# EAGLE board TTGO_shield_revE (EAGLE 9.0.1)
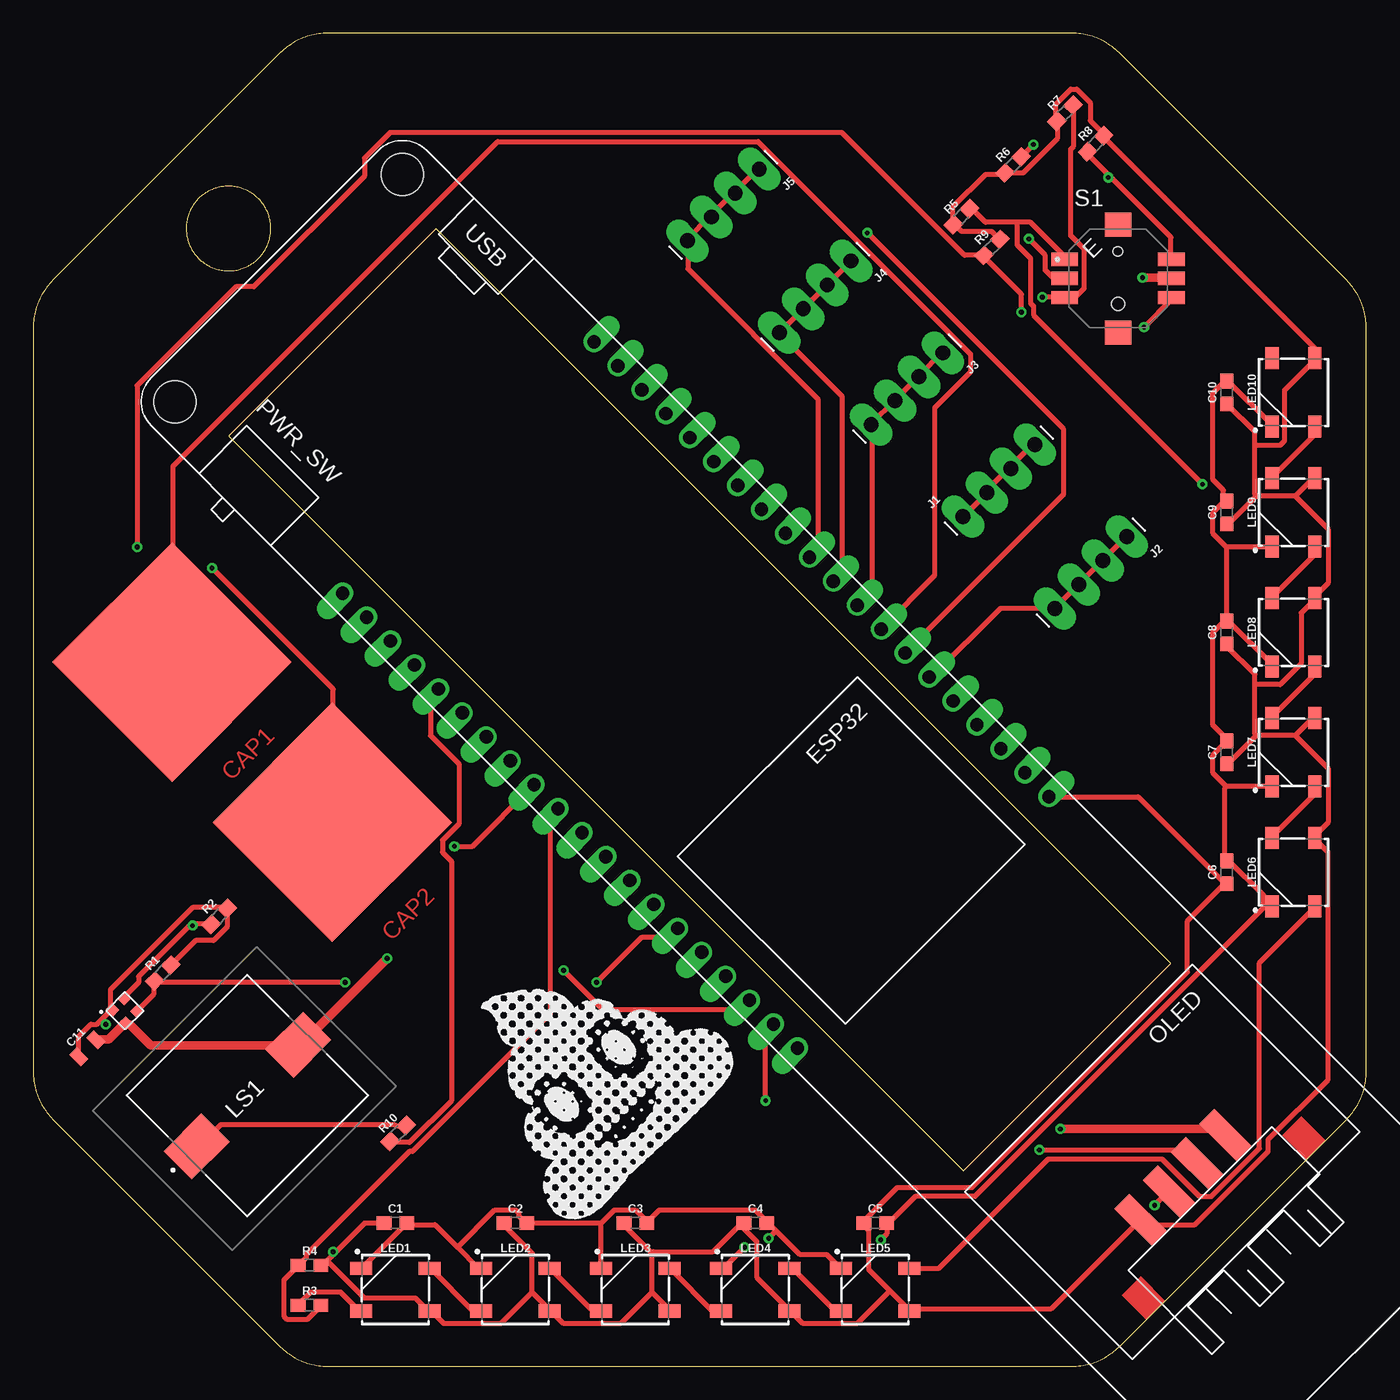
[diagram p0: board, top side]
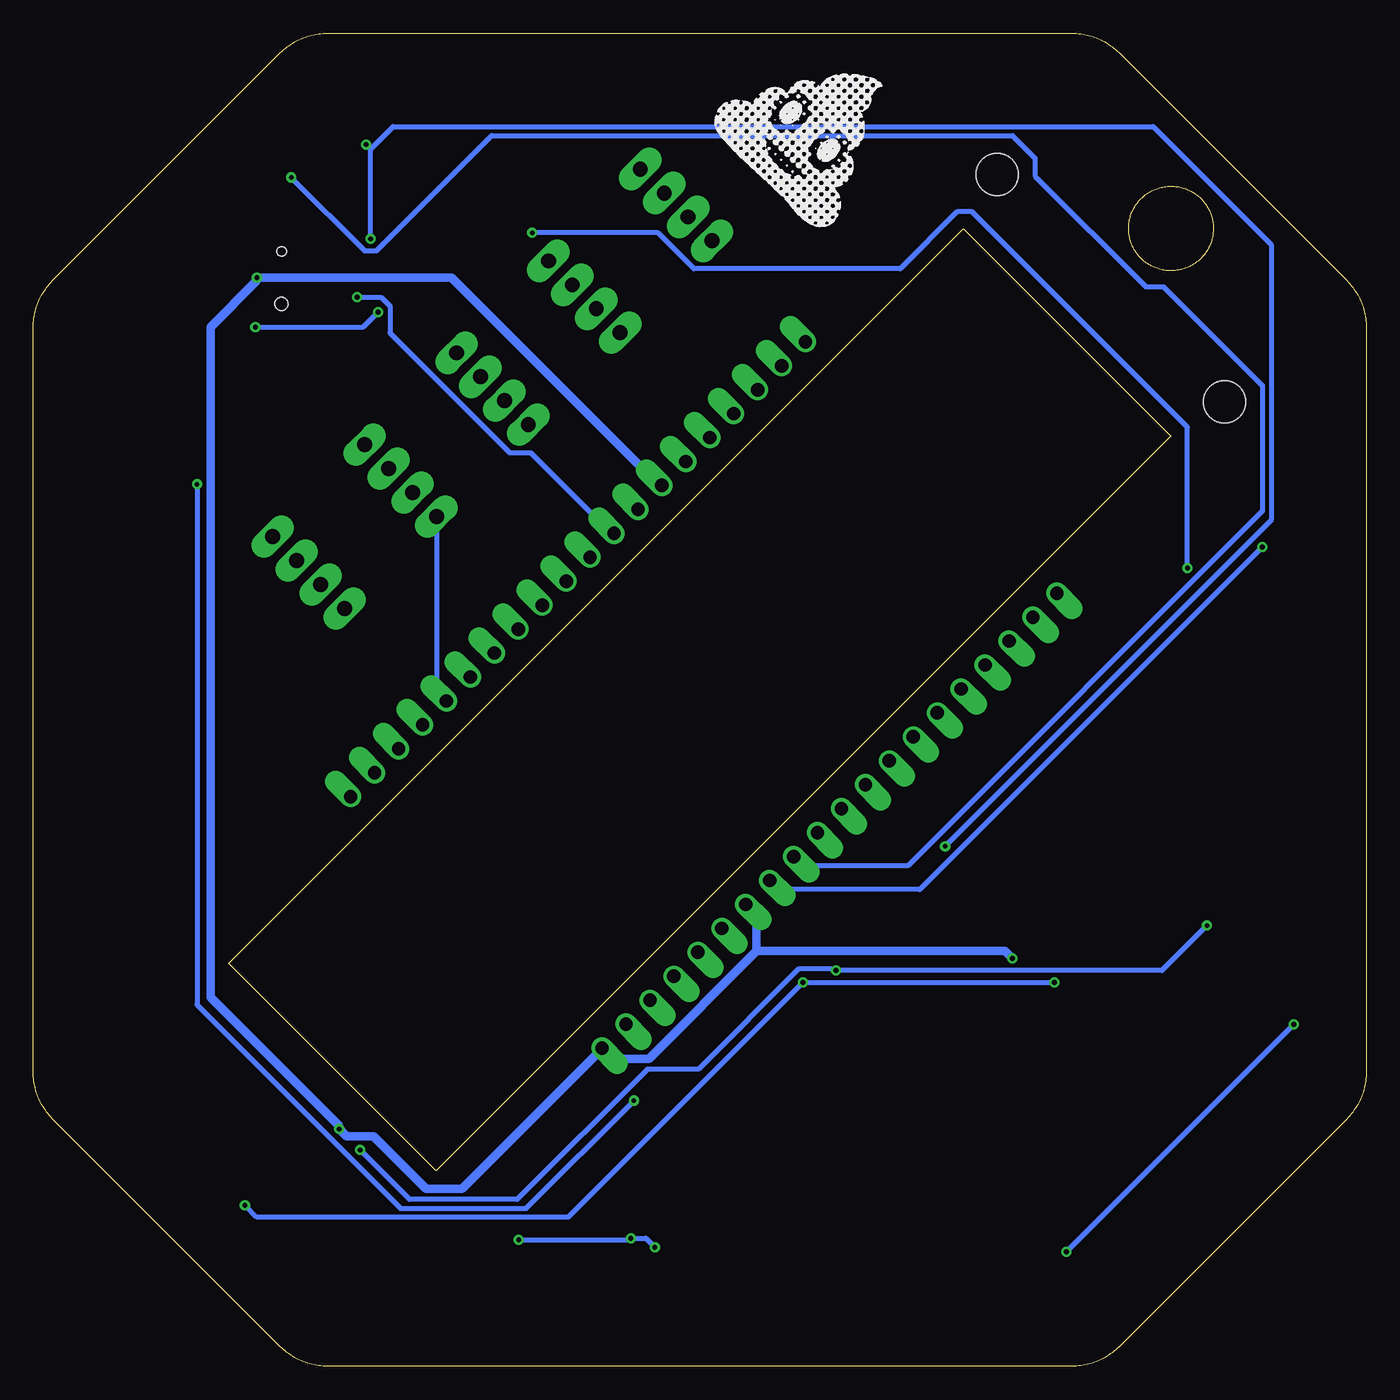
[diagram p1: board, bottom side, seen from below]

Size 100 x 100 mm. Coordinates in mm from the lower left corner, seen from the top.
Outline: 1.46,81.46 1.35,81.34 1.23,81.22 1.12,81.08 1.02,80.95 0.91,80.81 0.82,80.67 0.73,80.53 0.64,80.38 0.56,80.23 0.48,80.08 0.41,79.92 0.35,79.76 0.29,79.6 0.23,79.44 0.19,79.28 0.14,79.11 0.1,78.95 0.07,78.78 0.05,78.61 0.03,78.44 0.01,78.27 0,78.1 0,77.93 0,22.07 0,21.9 0.01,21.73 0.03,21.56 0.05,21.39 0.07,21.22 0.1,21.05 0.14,20.89 0.19,20.72 0.23,20.56 0.29,20.4 0.35,20.24 0.41,20.08 0.48,19.92 0.56,19.77 0.64,19.62 0.73,19.47 0.82,19.33 0.91,19.19 1.02,19.05 1.12,18.92 1.23,18.79 1.35,18.66 1.46,18.54 18.54,1.46 18.66,1.35 18.78,1.23 18.92,1.12 19.05,1.02 19.19,0.92 19.33,0.82 19.47,0.73 19.62,0.64 19.77,0.56 19.92,0.48 20.08,0.41 20.24,0.35 20.4,0.29 20.56,0.23 20.72,0.19 20.89,0.14 21.05,0.1 21.22,0.07 21.39,0.05 21.56,0.03 21.73,0.01 21.9,0 22.07,0 77.93,0 78.1,0 78.27,0.01 78.44,0.03 78.61,0.05 78.78,0.07 78.95,0.1 79.11,0.14 79.28,0.19 79.44,0.23 79.6,0.29 79.76,0.35 79.92,0.41 80.08,0.48 80.23,0.56 80.38,0.64 80.53,0.73 80.67,0.82 80.81,0.92 80.95,1.02 81.08,1.12 81.21,1.23 81.34,1.35 81.46,1.46 98.54,18.54 98.65,18.66 98.77,18.79 98.88,18.92 98.98,19.05 99.08,19.19 99.18,19.33 99.27,19.47 99.36,19.62 99.44,19.77 99.52,19.92 99.59,20.08 99.65,20.24 99.71,20.4 99.77,20.56 99.81,20.72 99.86,20.89 99.9,21.05 99.93,21.22 99.95,21.39 99.97,21.56 99.99,21.73 100,21.9 100,22.07 100,77.93 100,78.1 99.99,78.27 99.97,78.44 99.95,78.61 99.93,78.78 99.9,78.95 99.86,79.11 99.81,79.28 99.77,79.44 99.71,79.6 99.65,79.76 99.59,79.92 99.52,80.08 99.44,80.23 99.36,80.38 99.27,80.53 99.18,80.67 99.08,80.81 98.98,80.95 98.88,81.08 98.77,81.22 98.65,81.34 98.54,81.46 81.46,98.54 81.34,98.65 81.21,98.77 81.08,98.88 80.95,98.98 80.81,99.09 80.67,99.18 80.53,99.27 80.38,99.36 80.23,99.44 80.08,99.52 79.92,99.59 79.76,99.65 79.6,99.71 79.44,99.77 79.28,99.81 79.11,99.86 78.95,99.9 78.78,99.93 78.61,99.95 78.44,99.97 78.27,99.99 78.1,100 77.93,100 22.07,100 21.9,100 21.73,99.99 21.56,99.97 21.39,99.95 21.22,99.93 21.05,99.9 20.89,99.86 20.72,99.81 20.56,99.77 20.4,99.71 20.24,99.65 20.08,99.59 19.92,99.52 19.77,99.44 19.62,99.36 19.47,99.27 19.33,99.18 19.19,99.09 19.05,98.98 18.92,98.88 18.78,98.77 18.66,98.65 18.54,98.54 1.46,81.46
Outline: 16.89,87.6 16.81,87.68 16.73,87.75 16.64,87.82 16.56,87.89 16.47,87.95 16.38,88.02 16.28,88.07 16.19,88.13 16.09,88.18 15.99,88.23 15.89,88.28 15.79,88.32 15.69,88.35 15.58,88.39 15.48,88.42 15.37,88.45 15.26,88.47 15.15,88.49 15.04,88.51 14.93,88.52 14.82,88.53 14.71,88.53 14.6,88.53 14.49,88.53 14.38,88.52 14.27,88.51 14.16,88.49 14.06,88.48 13.95,88.45 13.84,88.43 13.73,88.4 13.63,88.36 13.53,88.33 13.42,88.29 13.32,88.24 13.22,88.19 13.13,88.14 13.03,88.09 12.94,88.03 12.84,87.97 12.75,87.91 12.67,87.84 12.58,87.77 12.5,87.7 12.42,87.62 12.34,87.54 12.27,87.46 12.2,87.38 12.13,87.29 12.06,87.2 12,87.11 11.94,87.02 11.88,86.92 11.83,86.83 11.78,86.73 11.74,86.63 11.69,86.53 11.65,86.42 11.62,86.32 11.59,86.21 11.56,86.11 11.54,86 11.51,85.89 11.5,85.78 11.49,85.67 11.48,85.56 11.47,85.45 11.47,85.34 11.47,85.23 11.48,85.12 11.49,85.01 11.5,84.9 11.52,84.79 11.54,84.69 11.57,84.58 11.59,84.47 11.63,84.37 11.66,84.26 11.7,84.16 11.75,84.06 11.79,83.96 11.84,83.86 11.9,83.76 11.95,83.67 12.01,83.58 12.08,83.49 12.14,83.4 12.21,83.31 12.29,83.23 12.36,83.15 12.44,83.07 12.52,83 12.6,82.92 12.69,82.85 12.78,82.79 12.87,82.73 12.96,82.67 13.05,82.61 13.15,82.55 13.25,82.5 13.35,82.46 13.45,82.41 13.55,82.37 13.66,82.34 13.76,82.31 13.87,82.28 13.97,82.25 14.08,82.23 14.19,82.21 14.3,82.2 14.41,82.19 14.52,82.18 14.63,82.18 14.74,82.18 14.85,82.19 14.96,82.2 15.07,82.21 15.18,82.23 15.29,82.25 15.4,82.27 15.5,82.3 15.61,82.33 15.71,82.37 15.81,82.4 15.92,82.45 16.02,82.49 16.12,82.54 16.21,82.59 16.31,82.65 16.4,82.71 16.49,82.77 16.58,82.84 16.67,82.91 16.75,82.98 16.83,83.05 16.91,83.13 16.98,83.21 17.06,83.29 17.13,83.38 17.2,83.46 17.26,83.55 17.32,83.65 17.38,83.74 17.43,83.84 17.48,83.93 17.53,84.03 17.58,84.13 17.62,84.24 17.65,84.34 17.69,84.45 17.72,84.55 17.74,84.66 17.76,84.77 17.78,84.88 17.8,84.98 17.81,85.09 17.82,85.2 17.82,85.31 17.82,85.42 17.81,85.53 17.81,85.64 17.79,85.75 17.78,85.86 17.76,85.97 17.74,86.08 17.71,86.19 17.68,86.29 17.64,86.4 17.61,86.5 17.56,86.6 17.52,86.7 17.47,86.8 17.42,86.9 17.36,86.99 17.31,87.09 17.24,87.18 17.18,87.27 17.11,87.36 17.04,87.44 16.97,87.52 16.89,87.6
Outline: 30.2,85.36 14.64,69.8 69.8,14.64 85.36,30.2 30.2,85.36
Copper layers (1*16): Top 0.035mm / dielectric 1.5mm / Bottom 0.035mm
Design rules "default *": minimum track width 6mil, minimum drill 0.35mm, track to track 6mil, track to pad 6mil, pad to pad 6mil, via to via 6mil, smd to smd 6mil, copper to edge 40mil, drill to drill 6mil, minimum pad ring 12mil, minimum via ring 8mil, stop-mask expansion 4mil, vias tented up to drill 0mil, thermal gap 10mil
Net classes: 0 default: width 0.381 mm, clearance 0.254 mm; 1 ground: width 0.635 mm, clearance 0.254 mm

## Footprints (pad centres in the part's own frame; a part is rotated, then mirrored left to right if it is on the bottom)
0603 = smd 1.1 x 1: 1 -0.85,0; 2 0.85,0
0805 = smd 0.8 x 1.2: 1 -0.9,0; 2 0.9,0
CAPSENSE_BUTTON = smd 12.7 x 12.7: 1 0,0
10120045-400LF = smd 1.6 x 4: A 0.8,2; B 3.8,2; C 6.8,2; D 9.8,2
1X04_LONGPADS = drill 1.118 pad 1.88 long: 1 0,0; 2 2.54,0; 3 5.08,0; 4 7.62,0
WS2812B = smd 1.651 x 1: 1 2.577,-1.6; 2 2.577,1.6; 3 -2.577,1.6; 4 -2.577,-1.6
CT1205HSMTTR = smd 4 x 3: 1 -5.4,0; 2 5.4,0
CHIPLED-4 = smd 0.7 x 0.75: 1 -0.6,0.7; 2 -0.6,-0.7; 3 0.6,-0.7; 4 0.6,0.7
TTGO-ESP32-OLED-18650 = drill 1 offset: 0 26.67,16.51; 2 26.67,13.97; 3.3V 0,49.53; 4 26.67,19.05; 5 26.67,26.67; 5V 0,3.81; 12 0,19.05; 13 0,13.97; 14 0,21.59; 15 26.67,11.43; 16 26.67,21.59; 17 26.67,24.13; 18 26.67,29.21; 19 26.67,31.75; 21 26.67,36.83; 22 26.67,44.45; 23 26.67,46.99; 25 0,29.21; 26 0,26.67; 27 0,24.13; 32 0,34.29; 33 0,31.75; 34 0,39.37; 35 0,36.83; CLK 26.67,3.81; CMD 0,6.35; EN 0,46.99; GND 0,16.51; GND_2 26.67,34.29; GND_3 26.67,49.53; NC 0,1.27; NC_2 26.67,1.27; RX 26.67,39.37; SD0 26.67,6.35; SD1 26.67,8.89; SD2 0,11.43; SD3 0,8.89; SVN 0,41.91; SVP 0,44.45; TX 26.67,41.91 | hole 3.175: 1.27,-17.78; 25.4,-17.78
JS1400BFQ = smd 2 x 1: 1 -4,1.43; 2 -4,0; 3 -4,-1.43; 4 4,1.43; 5 4,0; 6 4,-1.43 | smd 2 x 1.8: P$1 0,4.05; P$2 0,-4.05 | hole 0.991: 0,-1.905 | hole 0.711: 0,2.032

## Placement (x,y rotation side)
C1  0.1uF  [0603]  27.17,10.75 0 top
C2  0.1uF  [0603]  36.17,10.75 0 top
C3  0.1uF  [0603]  45.17,10.75 0 top
C4  0.1uF  [0603]  54.17,10.75 0 top
C5  0.1uF  [0603]  63.17,10.75 0 top
C6  0.1uF  [0603]  89.54,37.06 90 top
C7  0.1uF  [0603]  89.54,46.06 90 top
C8  0.1uF  [0603]  89.54,55.06 90 top
C9  0.1uF  [0603]  89.54,64.06 90 top
C10  0.1uF  [0603]  89.54,73.06 90 top
C11  1.0uF  [0805]  4.04,23.84 45 top
CAP1  CAPSENSE_BUTTON  [CAPSENSE_BUTTON]  10.4,52.83 45 top
CAP2  CAPSENSE_BUTTON  [CAPSENSE_BUTTON]  22.42,40.81 45 top
HEMA1  10120045-400LF  [10120045-400LF]  83.94,8.99 45 top
J1  [1X04_LONGPADS]  69.76,63.75 45 top
J2  [1X04_LONGPADS]  82.04,62.24 225 top
J3  [1X04_LONGPADS]  68.25,76.03 225 top
J4  [1X04_LONGPADS]  61.36,82.92 225 top
J5  [1X04_LONGPADS]  54.46,89.82 225 top
LED1  WS2812B  [WS2812B]  27.17,5.75 0 top
LED2  WS2812B  [WS2812B]  36.17,5.75 0 top
LED3  WS2812B  [WS2812B]  45.17,5.75 0 top
LED4  WS2812B  [WS2812B]  54.17,5.75 0 top
LED5  WS2812B  [WS2812B]  63.17,5.75 0 top
LED6  WS2812B  [WS2812B]  94.54,37.06 90 top
LED7  WS2812B  [WS2812B]  94.54,46.06 90 top
LED8  WS2812B  [WS2812B]  94.54,55.06 90 top
LED9  WS2812B  [WS2812B]  94.54,64.06 90 top
LED10  WS2812B  [WS2812B]  94.54,73.06 90 top
LS1  CT-1205H-SMT-TR  [CT1205HSMTTR]  16.06,20.3 45 top
LTSNS1  LTR-329ALS-01  [CHIPLED-4]  6.87,26.67 45 top
MAIN  TTGO-ESP32-OLED-18650  [TTGO-ESP32-OLED-18650]  41.16,77.75 225 top
R1  4.7k  [0603]  9.69,29.49 45 top
R2  4.7k  [0603]  13.94,33.74 45 top
R3  470  [0603]  20.72,4.57 0 top
R4  10k  [0603]  20.72,7.57 0 top
R5  10k  [0603]  69.62,86.24 45 top
R6  10k  [0603]  73.51,90.13 45 top
R7  10k  [0603]  77.4,94.02 45 top
R8  10k  [0603]  79.7,91.72 45 top
R9  10k  [0603]  71.92,83.94 45 top
R10  220  [0603]  27.37,17.47 45 top
S1  JS1400BFQ  [JS1400BFQ]  81.38,81.6 0 top

## Library data of the parts
C1-C10 = SparkFun-Capacitors; PROD_ID: CAP-08604
C11 = SparkFun-Capacitors; PROD_ID: CAP-08064
CAP1 CAP2 HEMA1 MAIN S1 = BadgeParts
J1-J5 = SparkFun-Connectors; PROD_ID: CONN-09696
LED1-LED10 = SparkFun-LED; PROD_ID: DIO-12503
LS1 = BadgeParts; ARROW_PART_NUMBER: CT-1205H-SMT-TR; ARROW_PRICE/STOCK: https://www.arrow.com/en/products/ct-1205h-smt-tr/cui-inc; DESCRIPTION: Speakers & Transducers Buzzers; HEIGHT: 10mm; MANUFACTURER_NAME: CUI; MANUFACTURER_PART_NUMBER: CT-1205H-SMT-TR
LTSNS1 = NickParts
R1 R2 = SparkFun-Resistors; PROD_ID: RES-07857
R3 R10 = SparkFun-Resistors; PROD_ID: RES-07869
R4-R9 = SparkFun-Resistors; PROD_ID: RES-00824

## Nets
5V: MAIN.5V
15: MAIN.15 R10.1
25: J3.1 J3.2 J3.3 J3.4 MAIN.25
26: J4.1 J4.2 J4.3 J4.4 MAIN.26
27: J5.1 J5.2 J5.3 J5.4 MAIN.27
32: CAP2.1 MAIN.32
33: CAP1.1 MAIN.33
34: J1.1 J1.2 J1.3 J1.4 MAIN.34
35: J2.1 J2.2 J2.3 J2.4 MAIN.35
GND [ground]: C11.2 HEMA1.D LS1.2 LTSNS1.2 MAIN.GND MAIN.GND_2 MAIN.GND_3 S1.5
GND1: C1.2 C2.2 C3.2 C4.2 C5.2 C6.2 C7.2 C8.2 C9.2 C10.2 LED1.3 LED2.3 LED3.3 LED4.3 LED5.3 LED6.3 LED7.3 LED8.3 LED9.3 LED10.3
J-DOWN: MAIN.18 R8.1 S1.4
J-LEFT: MAIN.19 R9.1 S1.6
J-PRESS: MAIN.16 R6.2 S1.2
J-RIGHT: MAIN.23 R5.2 S1.1
J-UP: MAIN.14 R7.2 S1.3
N$1: LED5.2 LED6.4
N$2: LED6.2 LED7.4
N$3: LED7.2 LED8.4
N$4: LED8.2 LED9.4
N$5: LED4.2 LED5.4
N$6: LED9.2 LED10.4
N$7: LS1.1 R10.2
N$9: LED1.2 LED2.4
N$10: LED2.2 LED3.4
N$11: LED3.2 LED4.4
N$12: LED1.4 R3.1
RGBLEDS: MAIN.17 R3.2 R4.1
SCL: HEMA1.C LTSNS1.4 MAIN.22 R2.1
SDA: HEMA1.B LTSNS1.3 MAIN.21 R1.1
VDD: C1.1 C2.1 C3.1 C4.1 C5.1 C6.1 C7.1 C8.1 C9.1 C10.1 C11.1 HEMA1.A LED1.1 LED2.1 LED3.1 LED4.1 LED5.1 LED6.1 LED7.1 LED8.1 LED9.1 LED10.1 LTSNS1.1 MAIN.3.3V R1.2 R2.2 R4.2 R5.1 R6.1 R7.1 R8.2 R9.2

## Tracks (layer width: path | path; a pad name or v marks a point on that pad's centre or on a via)
15
  Top 0.381: R10.1 26.88,16.78 28.22,16.78 31.37,19.93 31.37,37.89 30.69,38.56 30.69,39.46 31.93,40.69 31.93,45.18 29.79,47.31 29.79,50.01 30.47,50.68 MAIN.15
25
  Top 0.381: J3.1 68.18,76.05 66.5,74.37 J3.2 66.39,74.26 64.71,72.57 J3.3 64.59,72.46 62.91,70.78 J3.4 62.91,70.55 62.91,58.2 61.9,57.19 MAIN.25
26
  Top 0.381: J4.1 61.34,82.9 59.65,81.22 J4.2 59.54,81.1 57.86,79.42 J4.3 57.63,79.19 56.06,77.62 J4.4 55.95,77.51 60.66,72.8 60.66,59.55 60.1,58.99 MAIN.26
27
  Top 0.381: J5.1 54.38,89.86 52.69,88.18 J5.2 52.58,88.06 50.9,86.38 J5.3 50.79,86.27 49.1,84.58 J5.4 49.1,84.36 49.1,82.34 58.87,72.57 58.87,61.35 58.31,60.79 MAIN.27
32  (via drill 0.35)
  Top 0.381: v62.57,85.03 77.28,70.33 77.28,65.39 65.49,53.6 MAIN.32 | v13.41,59.89 22.5,50.79 22.5,40.92 CAP2.1
  Bottom 0.381: v62.57,85.03 53.14,85.03 50.45,82.34 34.96,82.34 30.69,86.6 29.57,86.6 13.41,70.44 v13.41,59.89
33
  Top 0.381: MAIN.33 63.69,55.4 67.62,59.33 67.62,71.9 70.32,74.59 70.32,75.94 54.38,91.88 34.85,91.88 10.49,67.52 10.49,52.93 CAP1.1
34
  Top 0.381: J1.4 75.03,69.2 73.35,67.52 J1.3 73.24,67.41 71.55,65.72 J1.2 71.44,65.39 69.87,63.82 J1.1
  Bottom 0.381: J1.1 69.76,50.68 69.08,50.01 MAIN.34
35
  Top 0.381: J2.1 81.99,62.24 80.31,60.56 J2.2 80.2,60.45 78.51,58.76 J2.3 78.29,58.54 76.72,56.97 J2.4 76.6,56.86 72.56,56.86 67.4,51.69 MAIN.35
GND  (via drill 0.35)
  Top 0.635: v83.23,81.66 85.25,81.66 S1.5 | C11.2 4.76,24.53 5.66,24.53 6.89,25.76 LTSNS1.2 7.23,25.65 8.8,24.08 19.8,24.08 LS1.2 20.14,24.19 v26.54,30.59 | v77.05,17.79 88.95,17.79 89.4,17.34 HEMA1.D
  Bottom 0.635: MAIN.GND 53.03,66.06 68.63,81.66 v83.23,81.66 83.23,81.44 86.71,77.96 86.71,27.67 77.05,18.02 v77.05,17.79 76.49,17.23 74.47,17.23 70.54,13.3 67.85,13.3 57.52,23.63 MAIN.GND_3 57.3,23.85 56.51,23.07 53.82,23.07 45.73,31.15 | 45.73,31.15 45.73,33.62 46.63,34.52 MAIN.GND_2 | v26.54,30.59 27.1,31.15 45.73,31.15
GND1  (via drill 0.35)
  Top 0.381: 55.72,10.16 57.52,8.36 59.54,8.36 60.55,7.35 LED5.3 | 55.72,10.16 55.16,10.72 C4.2 55.05,10.83 54.15,11.73 46.97,11.73 46.18,10.94 C3.2 46.07,10.83 45.17,11.73 43.6,11.73 42.59,10.72 | v53.37,8.92 51.8,7.35 LED4.3 | 55.72,10.16 v55.16,9.6 | 42.59,10.72 LED3.3 | 42.59,10.72 37.2,10.72 C2.2 36.87,10.83 36.42,11.28 36.42,11.51 36.19,11.73 34.62,11.73 31.81,8.92 | LED1.3 24.63,7.35 28,10.72 C1.2 28.11,10.61 30.13,10.61 31.81,8.92 | 31.81,8.92 33.39,7.35 LED2.3 | LED10.3 92.99,70.55 89.63,73.92 C10.2 89.4,73.92 88.5,73.02 88.5,66.51 89.29,65.72 89.29,65.05 C9.2 89.4,64.94 88.5,64.04 88.5,62.47 89.51,61.46 | C8.2 89.63,55.96 92.99,52.59 LED8.3 | 89.51,61.46 92.88,61.46 LED9.3 | 89.51,61.46 89.51,56.07 C8.2 | 89.51,43.5 88.5,44.51 88.5,45.86 89.51,46.87 C7.2 89.51,47.09 88.5,48.1 88.5,55.06 89.4,55.96 C8.2 | 89.51,43.5 92.88,43.5 LED7.3 | 92.43,34.52 70.65,12.74 66.16,12.74 64.14,10.72 C5.2 64.03,10.61 64.03,9.93 v63.58,9.49 | 92.43,34.52 92.88,34.52 LED6.3 | 92.43,34.52 92.32,34.63 92.32,35.3 89.63,38 C6.2 89.4,38 89.4,43.39 89.51,43.5
  Bottom 0.381: v53.37,8.92 54.04,9.6 v55.16,9.6 55.28,9.49 v63.58,9.49
J-DOWN  (via drill 0.35)
  Top 0.381: 80.76,89.3 85.36,84.7 85.36,83.12 S1.4 | 80.76,89.3 79.07,90.98 R8.1 | v80.64,89.19 80.76,89.3
  Bottom 0.381: v80.64,89.19 75.14,83.68 74.25,83.68 65.6,92.33 26.54,92.33 24.86,90.64 24.86,89.3 16.55,80.99 15.2,80.99 7.79,73.58 7.79,64.15 34.4,37.55 42.25,37.55 42.93,38.22 MAIN.18
J-LEFT  (via drill 0.35)
  Top 0.381: v74.13,79.08 74.13,80.43 71.33,83.24 R9.1 71.22,83.35 69.87,83.35 60.66,92.55 26.76,92.55 24.86,90.64 24.86,89.3 16.55,80.99 15.2,80.99 7.79,73.58 v7.79,61.46 | v83.34,77.96 85.36,79.98 S1.6
  Bottom 0.381: v74.13,79.08 75.26,77.96 v83.34,77.96 | v7.79,61.46 33.5,35.75 44.05,35.75 44.72,36.43 MAIN.19
J-PRESS  (via drill 0.35)
  Top 0.381: v75.03,91.65 74.13,90.76 R6.2 | v74.7,84.58 75.93,83.35 75.93,82.23 76.6,81.55 77.28,81.55 S1.2 | v31.59,39.01 32.94,39.01 37.54,43.61 MAIN.16
  Bottom 0.381: 74.7,91.32 v75.03,91.65 | v74.7,84.58 74.7,91.32 | v31.59,39.01 7.12,63.48 7.12,84.13 15.99,93 73.01,93 74.7,91.32
J-RIGHT  (via drill 0.35)
  Top 0.381: 73.8,85.82 74.81,85.82 77.39,83.24 S1.1 | 73.8,85.82 71.44,85.82 70.43,86.83 R5.2 | v54.94,19.93 54.94,24.86 55.61,25.54 MAIN.23 | v87.72,66.17 75.03,78.86 75.03,79.53 74.81,79.76 74.81,83.12 73.8,84.13 73.8,85.82
  Bottom 0.381: v54.94,19.93 63.02,11.84 72.45,11.84 87.72,27.11 v87.72,66.17
J-UP  (via drill 0.35)
  Top 0.381: R7.2 78.06,94.46 78.06,91.54 77.84,91.32 77.84,84.81 78.85,83.8 78.85,80.88 78.18,80.21 77.5,80.21 S1.3 77.28,80.21 v75.71,80.21
  Bottom 0.381: v75.71,80.21 73.91,80.21 73.24,79.53 73.24,77.51 64.26,68.53 62.68,68.53 56.62,62.47 MAIN.14
N$1
  Top 0.381: LED6.4 96.14,34.41 91.98,30.25 91.98,16.33 88.39,12.74 87.49,12.74 84.69,15.55 76.15,15.55 67.96,7.35 65.94,7.35 LED5.2
N$2
  Top 0.381: LED6.2 92.99,39.79 96.14,42.94 96.14,43.39 LED7.4
N$3
  Top 0.381: LED7.2 92.99,48.77 96.14,51.92 96.14,52.37 LED8.4
N$4
  Top 0.381: LED8.2 92.99,57.75 96.14,60.9 96.14,61.35 LED9.4
N$5
  Top 0.381: LED4.2 56.96,7.35 60.21,4.1 60.44,4.1 LED5.4
N$6
  Top 0.381: LED9.2 92.99,66.73 96.14,69.88 96.14,70.33 LED10.4
N$7
  Top 0.381: R10.2 27.89,18.02 27.21,18.02 27.1,18.13 14.08,18.13 12.4,16.45 LS1.1
N$9
  Top 0.381: LED1.2 29.79,7.35 33.05,4.1 33.5,4.1 LED2.4
N$10
  Top 0.381: LED2.2 38.77,7.35 42.03,4.1 42.48,4.1 LED3.4
N$11
  Top 0.381: LED3.2 47.87,7.24 51.01,4.1 51.46,4.1 LED4.4
N$12
  Top 0.381: R3.1 19.92,4.66 20.81,5.56 23.06,5.56 24.52,4.1 LED1.4
RGBLEDS
  Top 0.381: R3.2 21.49,4.43 20.59,3.54 19.02,3.54 18.79,3.76 18.79,6.45 19.8,7.47 R4.1 20.03,7.69 20.48,8.14 20.48,8.36 28.22,16.11 28.45,16.11 38.77,26.44 38.77,41.03 39.45,41.7 MAIN.17
SCL  (via drill 0.35)
  Top 0.381: 11.83,33.17 7.9,29.24 7.9,28.79 6.78,27.67 LTSNS1.4 | 11.83,33.17 13.18,33.17 R2.1 | v39.78,29.69 42.7,26.77 53.03,26.77 53.7,27.45 MAIN.22 | v11.95,33.06 11.83,33.17 | v75.48,16.22 86.26,16.22 87.27,15.21 HEMA1.C
  Bottom 0.381: v11.95,33.06 15.31,29.69 v39.78,29.69 39.9,29.8 42.59,29.8 50.11,22.28 53.93,22.28 63.69,12.52 71.78,12.52 v75.48,16.22
SDA  (via drill 0.35)
  Top 0.381: LTSNS1.3 7.79,26.66 9.03,27.9 9.03,28.79 R1.1 9.25,28.79 v23.4,28.79 | v42.25,28.79 45.62,32.16 47.64,32.16 48.32,32.83 MAIN.21 | v84.12,12.07 85.14,13.08 HEMA1.B
  Bottom 0.381: v23.4,28.79 v42.25,28.79 59.88,11.17 83.23,11.17 v84.12,12.07
VDD  (via drill 0.35)
  Top 0.381: 91.76,47.31 89.63,45.18 C7.1 | 94.68,47.31 91.76,47.31 | 94.68,47.31 96.02,48.66 LED7.1 | 91.65,51.13 91.65,47.43 91.76,47.31 | 91.65,51.13 91.65,51.92 89.51,54.05 C8.1 | 94.68,47.31 97.15,44.85 97.15,40.8 96.14,39.79 LED6.1 96.14,39.57 97.15,38.56 97.15,21.5 92.66,17.01 92.66,16.11 87.16,10.61 83.56,10.61 83.23,10.94 HEMA1.A 83,10.94 76.38,4.32 65.83,4.32 LED5.1 65.72,4.21 64.26,5.67 | R9.2 72.45,84.58 71.89,85.14 69.64,85.14 69.2,85.59 R5.1 68.97,85.82 68.97,86.94 71.44,89.41 72.79,89.41 R6.1 73.12,89.52 74.25,89.52 76.83,92.1 76.83,93.23 R7.1 76.72,93.56 76.72,94.69 77.84,95.81 78.29,95.81 79.3,94.8 79.3,93.45 80.31,92.44 R8.2 80.31,92.22 96.14,76.39 96.14,75.71 LED10.1 96.14,75.49 93.89,73.25 93.89,69.43 93.55,69.09 91.65,69.09 | 91.76,65.28 89.63,63.14 C9.1 | 94.68,65.28 91.76,65.28 | 94.68,65.28 96.02,66.62 LED9.1 | 91.65,69.09 91.65,65.39 91.76,65.28 | 91.65,69.09 91.65,70.1 89.63,72.12 C10.1 | 94.68,65.28 97.15,62.81 97.15,58.76 96.14,57.75 LED8.1 96.14,57.53 95.13,56.52 95.13,52.7 93.55,51.13 91.65,51.13 | 5.1,25.99 4.76,25.65 4.31,25.65 3.41,24.75 3.41,23.4 C11.1 | 5.1,25.99 5.88,26.77 LTSNS1.1 5.77,26.88 5.77,28.23 11.95,34.41 14.42,34.41 R2.2 14.53,34.29 14.53,32.95 13.52,31.94 12.17,31.94 10.37,30.14 R1.2 | 22.61,8.48 24.86,10.72 26.2,10.72 C1.1 | 22.61,8.48 22.05,7.91 | 22.05,7.91 21.71,7.58 R4.2 | 37.43,5.56 37.43,8.48 35.29,10.61 C2.1 | 37.43,5.56 38.77,4.21 LED2.1 38.89,4.1 39.78,3.2 44.05,3.2 46.41,5.56 | 37.43,5.56 35.07,3.2 30.8,3.2 29.91,4.1 LED1.1 29.57,4.21 28.67,5.11 24.86,5.11 22.05,7.91 | v5.44,25.65 5.1,25.99 | v22.5,8.59 22.61,8.48
  Top 0.381: 46.41,8.48 44.27,10.61 C3.1 | 46.41,5.56 46.41,8.48 | 46.41,5.56 47.75,4.21 LED3.1 | 46.41,8.48 46.52,8.59 51.01,8.59 53.14,10.72 C4.1 53.14,10.5 54.27,9.37 54.27,6.68 56.74,4.21 LED4.1 56.85,4.1 57.75,3.2 61.79,3.2 64.26,5.67 | MAIN.3.3V 76.38,42.71 82.89,42.71 89.4,36.2 C6.1 89.29,36.09 86.59,33.4 86.59,29.58 70.43,13.41 64.82,13.41 62.35,10.94 C5.1 62.24,10.61 62.68,10.16 62.68,7.24 64.26,5.67
  Bottom 0.381: v22.5,8.59 v5.44,25.65

## Text on the board
bPlace: /Users/taylor/Documents/Github/CAAint/Media/Poop_Emoji_7b204f05-eec6-4496-91b1-351acc03d2c7_large.bmp